# Altium PCB Sheet1.PCBDOC
Units mm, origin at the board's own origin, x right, y up, seen from the top; angles counter-clockwise.
Board outline 299.72 x 199.9 mm, 2 copper layers (Top Layer, Bottom Layer); 15 components, 19 nets, 83 pads, 8 vias.
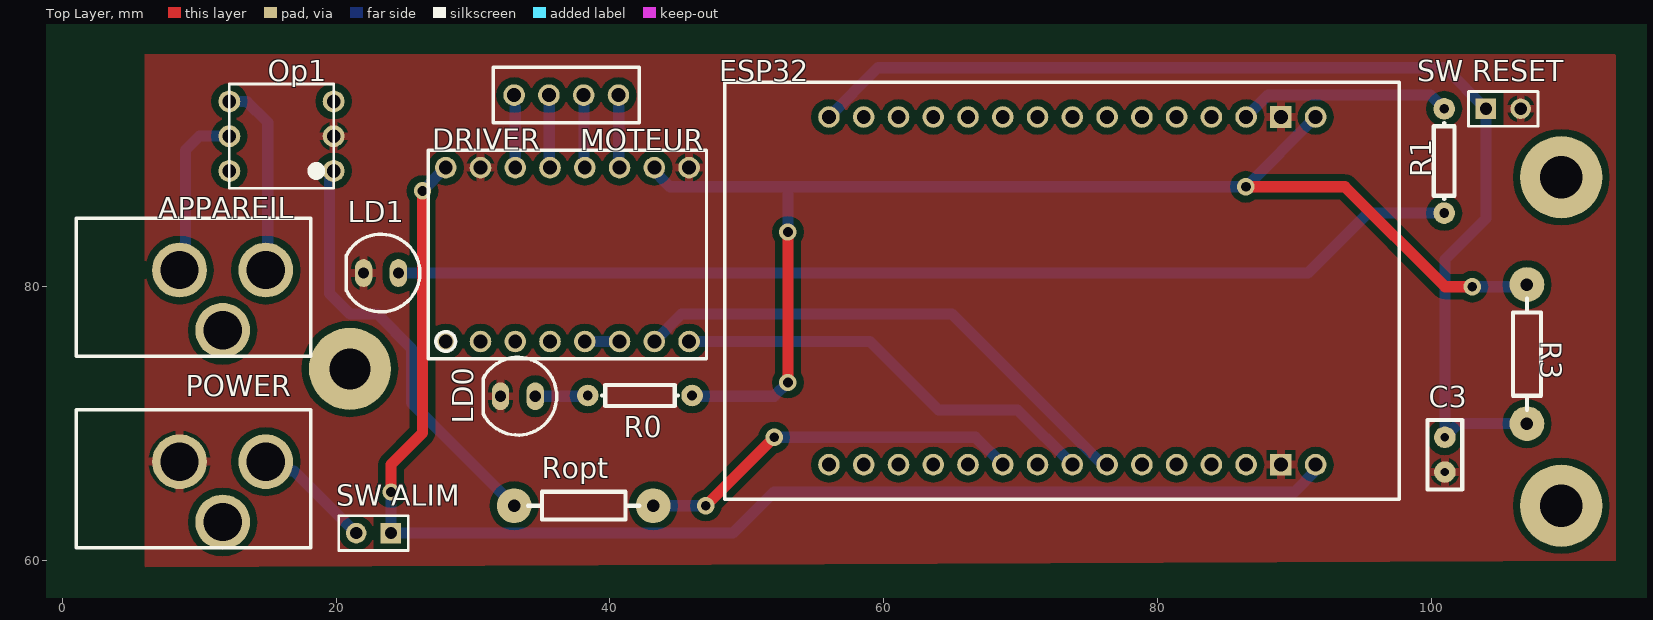
[diagram p0: Top Layer view]
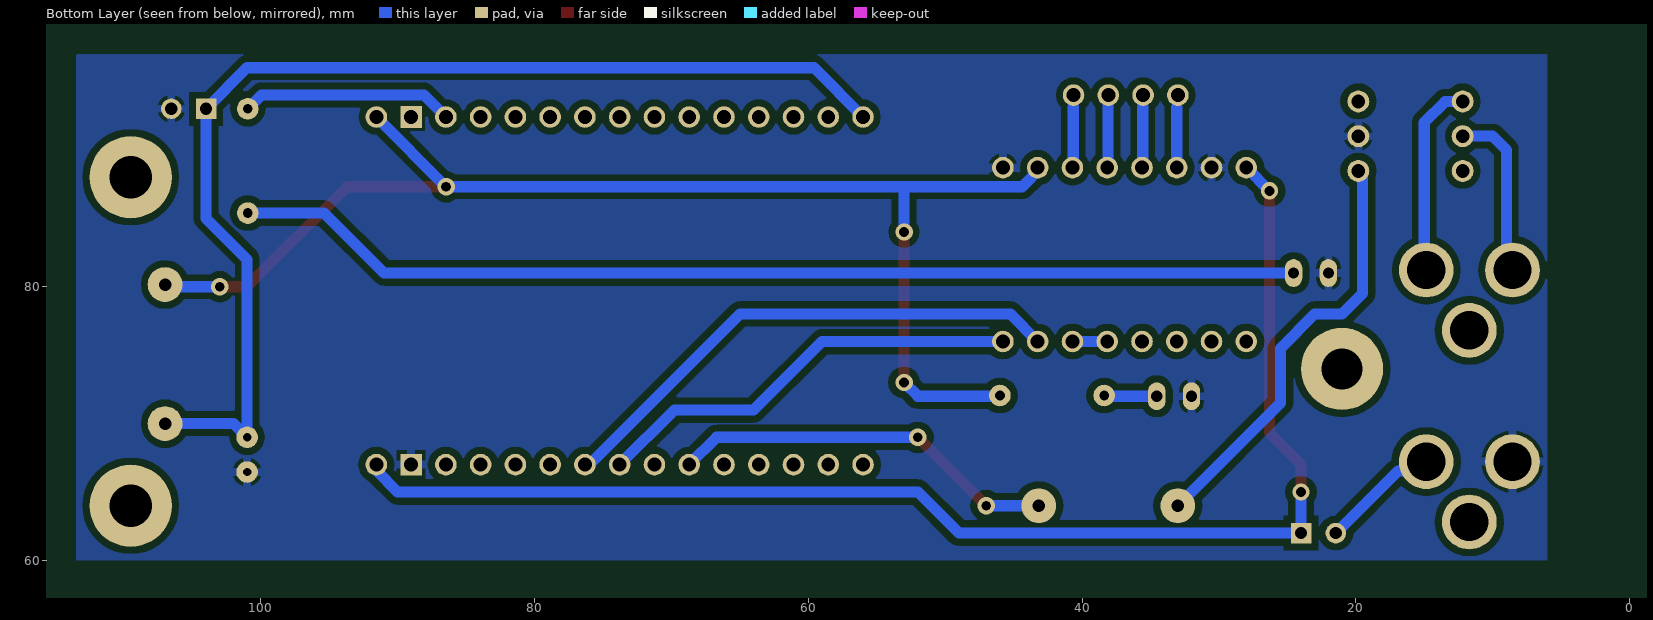
[diagram p1: Bottom Layer view, seen from below]

## Layer stack, top to bottom
Top Solder: solder mask 0.0102, Solder Resist, Dk 3.5
Top Layer: signal copper 0.0356
Dielectric1: dielectric 0.32, FR-4, Dk 4.8
Bottom Layer: signal copper 0.0356
Bottom Solder: solder mask 0.0102, Solder Resist, Dk 3.5

## Board outline
-141.655,-46.39 158.065,-46.39 158.065,153.508 -141.655,153.508

## Design rules (kind name [scope] priority, off if disabled: settings)
Clearance Clearance_bottom_polygon [OnLayer('Bottom Layer') Or OnLayer('Multi-Layer') vs OnLayer('Bottom Layer')  And  InPoly] p1: gap=0.508
Clearance Clearance_bottom_polygon_keepout [OnLayer('Bottom Layer') Or OnLayer('Multi-Layer') Or InPoly vs OnLayer('Keepout')] p2: gap=0
Clearance Clearance_top_polygon [OnLayer('Top Layer')  Or OnLayer('Multi-Layer') vs OnLayer('Top Layer') And InPoly] p3: gap=0.508
Clearance Clearance_bottom [OnLayer('Bottom Layer') Or OnLayer('Multi-Layer') vs OnLayer('Bottom Layer')  And Not InPoly] p4: gap=0.203
Clearance Clearance_top [OnLayer('Top Layer')  Or OnLayer('Multi-Layer') vs OnLayer('Top Layer') And Not InPoly] p5: gap=0.203
Clearance Clearance_pad_to_pad [OnLayer('Multi-Layer') vs OnLayer('Multi-Layer')] p6: gap=0.254
ComponentClearance ComponentClearance_bottom [OnLayer('Bottom Overlay') vs OnLayer('Bottom Overlay')] p1: gap=0 collisioncheckmode=3 verticalgap=0.254 showdistances=FALSE
ComponentClearance ComponentClearance_top [OnLayer('Top Overlay') vs OnLayer('Top Overlay')] p2: gap=0 collisioncheckmode=3 verticalgap=0.254 showdistances=FALSE
FabricationTestPointUsage TestPointUsage [All] p1: valid=0 allowmultiple=FALSE
FabricationTestpoint Testpoint [All] p1: side=3 testpointundercomponent=TRUE minsize=1.016 maxsize=2.54 preferedsize=1.524 minholesize=0 maxholesize=1.016 preferedholesize=0.813 testpointgrid=0.025 allowsidetop=TRUE allowsidebottom=TRUE usegrid=TRUE gridtolerance=0
HoleSize [All] p1: absolutevalues=TRUE maxlimit=25.4 minlimit=0.406 maxpercent=80.000 minpercent=20.000
MinimumAnnularRing [PadXSize_AllLayers = PadYSize_AllLayers] p1: minimumring=0.254
PermittedLayers [All] p1: toplayerpermitted=TRUE bottomlayerpermitted=TRUE
PolygonConnect [All] p1: connectstyle=Relief reliefconductorwidth=0.61 reliefentries=4 polygonreliefangle="90 Angle" airgapwidth=0.254
RoutingVias [All] p1: holewidth=0.406 width=1.27 viastyle="Through Hole" minholewidth=0.406 minwidth=1.27 maxholewidth=25.4 maxwidth=25.4
SMDToPlane [All] p1: distance=0
SolderMaskExpansion [All] p1: expansion=0.102
ViasUnderSMD [All] p1: allowed=FALSE
Width Width_botom_top [OnLayer('Bottom Layer') or OnLayer('Top Layer')] p1: maxlimit=254 minlimit=0.813 preferedwidth=0.813 minimp=50.000000 maximp=50.000000 favimp=50.000000
26 further rules are at their usual default settings.

## Components (designator, comment, footprint, x,y, rotation, side; value= is the part's Value field where it differs from the comment)
APPAREIL "Connecteur Power" "Connecteur Power" 18,85 r180 top
C3 "CAP" RAD0.1 101,69 r270 top
DRIVER "Driver" Driver 28,76 r90 top
ESP32 "ESP32devKit" ESP32 56,67 r90 top
LD0 "comment" LED5 32,72 r270 top
LD1 "comment" LED5 22,81 r270 top
MOTEUR "Moteur" Moteur 33,94 r90 top (schematic designator Moteur)
Op1 "Optocoupler" 4N26 16,91 r180 top
POWER "Connecteur Power" "Connecteur Power" 18,71 r180 top
R0 "RES" AXIAL0.3 46,72 r180 top
R1 "RES" AXIAL0.3 101,93 r270 top
R3 "RES" AXIAL0.4 107,70 r90 top (schematic designator R?)
Ropt "RES" AXIAL0.4 33,64 r0 top
"SW ALIM" "Header 2" HDR1X2 24,62 r180 top
"SW RESET" "Header 2" HDR1X2 104,93 r0 top

## Footprints (in the part's own frame and the unit in brackets; to place one, negate y for a bottom-side part, rotate by r counter-clockwise, add the part's x,y. Pads: shape width x height; smd on the part's side, far side on the other; paste and mask are expansions set on the pad)
4N26 [mm]
  round 1.6 hole 1: 1(-3.81,2.54) 2(-3.81,0) 3(-3.81,-2.54) 4(3.81,-2.54) 5(3.81,0) 6(3.81,2.54)
  silkscreen extent -3.81,-3.81 3.81,3.81
AXIAL0.3 [mil]
  round 62 hole 28: 1(0,-2) 2(300,-2)
  silkscreen extent 41,-32 259,28
AXIAL0.4 [mil]
  round 100 hole 36: 1(0,0) 2(400,0)
  silkscreen extent 40,-40 360,40
"Connecteur Power" [mm]
  round 4 hole 2.8: 0(3.15,3.78) 1(9.45,3.78) 2(6.3,8.19)
  silkscreen extent -0.13,0 17.01,10.08
Driver [mm]
  round 1.575 hole 1.016: 1(0,0) 2(0,-2.54) 3(0,-5.08) 4(0,-7.62) 5(0,-10.16) 6(0,-12.7) 7(0,-15.24) 8(0,-17.78) 9(12.7,-17.78) 10(12.7,-15.24) 11(12.7,-12.7) 12(12.7,-10.16) 13(12.7,-7.62) 14(12.7,-5.08) 15(12.7,-2.54) 16(12.7,0)
  silkscreen extent -1.27,-19.05 13.97,1.27
ESP32 [mm]
  round 1.575 hole 1.016: 0(0,0) 1(0,-2.54) 2(0,-5.08) 3(0,-7.62) 4(0,-10.16) 5(0,-12.7) 6(0,-15.24) 7(0,-17.78) 8(0,-20.32) 9(0,-22.86) 10(0,-25.4) 11(0,-27.94) 12(0,-30.48) 14(0,-35.56) 15(25.4,-35.56) 17(25.4,-30.48) 18(25.4,-27.94) 19(25.4,-25.4) 20(25.4,-22.86) 21(25.4,-20.32) 22(25.4,-17.78) 23(25.4,-15.24) 24(25.4,-12.7) 25(25.4,-10.16) 26(25.4,-7.62) 27(25.4,-5.08) 28(25.4,-2.54) 29(25.4,0)
  rect 1.575x1.575 hole 1.016: 13(0,-33.02) 16(25.4,-33.02)
  silkscreen extent -2.54,-41.66 27.94,7.62
HDR1X2 [mm] "Connector; Header; 2 Position"
  rect 1.5x1.5 hole 0.9: 1(0,0)
  round 1.5 hole 0.9: 2(2.54,0)
  silkscreen extent -1.27,-1.27 3.81,1.27
LED5 [mil] "5mm LED"
  oval 80x50 hole 32: A(0,100) K(0,0)
  silkscreen extent -112,-50 112,162
Moteur [mm]
  round 1.575 hole 1.016: 1(0,0) 2(0,-2.54) 3(0,-5.08) 4(0,-7.62)
  silkscreen extent -2.03,-9.14 2.03,1.52
RAD0.1 [mil]
  round 62 hole 24: 1(0,0) 2(100,0)
  silkscreen extent -50,-50 150,50

## Part data
C3: "capacité non polarisée"
DRIVER: "Driver A4988"
LD0 LD1: library part LED, "LED 5mm/3mm/CMS"
R0 R1 R3 Ropt: "resistance"
"SW ALIM" "SW RESET": "Header, 2-Pin"

## Free pads (board coordinates)
  round 6 hole 3: 0(21,74)
  round 6 hole 3.1: 1(109.5,88) 2(109.5,64)

## Via types
v1: diameter 1.27, hole 0.711, Top Layer to Bottom Layer, 8 vias

## Nets (pads, with @x,y where several pads share a name; then routed paths per layer and width w, separated by ;. In a path a pad name is that pad's centre, name@x,y a point inside that pad or via, vN(x,y) a via of type N, cw(c..) or ccw(c..) an arc to the next point about the centre after c; other vN are vias at no path point)
GND: "SW RESET.2" C3.2 DRIVER.9 DRIVER.15 ESP32.13 ESP32.16 LD0.K LD1.K Op1.2 POWER.1
NetAPPAREIL_0: APPAREIL.0 Op1.4 | length 14.7
  Bottom Layer w0.813: Op1.4 13.46,93.54 15,92 15,82.37 APPAREIL.0@13.85,81.22
NetAPPAREIL_1: APPAREIL.1 Op1.5 | length 13
  Bottom Layer w0.813: APPAREIL.1@7.55,81.22 9,82.67 9,90 10,91 Op1.5
NetC3_1: "SW RESET.1" C3.1 ESP32.29 R3.1 | length 82.4
  Bottom Layer w0.813: ESP32.29 59.6,96 101,96 104,93 104,85 101,82 C3.1 102,70 R3.1
NetDRIVER_5: DRIVER.5 DRIVER.6 | length 2.5
  Bottom Layer w0.813: DRIVER.5 DRIVER.6
NetDRIVER_7: DRIVER.7 ESP32.8 | length 38.5
  Bottom Layer w0.813: DRIVER.7 45.24,78 65,78 76,67 ESP32.8
NetDRIVER_8: DRIVER.8 ESP32.7 | length 31.7
  Bottom Layer w0.813: DRIVER.8 59,76 64,71 69.78,71 ESP32.7
NetDRIVER_10: DRIVER.10 ESP32.15 R0.1 R3.2 | length 96.6
  Top Layer w0.813: v1(53,73) v1(53,84) ; v1(86.463,87.303) 93.697,87.303 101,80 v1(103,80)
  Bottom Layer w0.813: DRIVER.10 42.986,88.7 44.383,87.303 53,87.303 ; R0.1@46,72 52,72 v1(53,73) ; v1@53,84.245 53,87.303 ; ESP32.15 v1(86.463,87.303) 53,87.303 ; v1(103,80) 106.84,80 R3.2
NetDRIVER_11: DRIVER.11 MOTEUR.4 | length 4.5
  Bottom Layer w0.813: 40.64,93.142 40.64,88.76 DRIVER.11
NetDRIVER_12: DRIVER.12 MOTEUR.3 | length 4.7
  Bottom Layer w0.813: MOTEUR.3@38.1,93.41 38.1,88.76 DRIVER.12
NetDRIVER_13: DRIVER.13 MOTEUR.2 | length 4.5
  Bottom Layer w0.813: 35.56,93.142 35.56,88.76 DRIVER.13
NetDRIVER_14: DRIVER.14 MOTEUR.1 | length 4.4
  Bottom Layer w0.813: DRIVER.14 33.08,93.082
NetDRIVER_16: "SW ALIM.1" DRIVER.16 ESP32.14 | length 98.2
  Top Layer w0.813: v1(24,65) 24,67 26.3,69.3 v1(26.3,87)
  Bottom Layer w0.813: v1(24,65) 24,62 49,62 52,65 90,65 91.56,66.56 ESP32.14 ; v1(26.3,87) DRIVER.16
NetESP32_5: ESP32.5 Ropt.2 | length 28.4
  Top Layer w0.813: v1(47,64) v1(52,69)
  Bottom Layer w0.813: Ropt.2 v1(47,64) ; v1(52,69) 66.7,69 ESP32.5
NetESP32_17: ESP32.17 R1.1 | length 15.6
  Bottom Layer w0.813: ESP32.17 88.08,94 99.949,94 R1.1@101,92.949
NetLD0_A: LD0.A R0.2 | length 3.8
  Bottom Layer w0.813: LD0.A R0.2@38.38,72
NetLD1_A: LD1.A R1.2 | length 78.2
  Bottom Layer w0.813: LD1.A 25.54,81 91,81 95.38,85.38 R1.2
NetOp1_1: Op1.1 Ropt.1 | length 31.4
  Bottom Layer w0.813: Op1.1 19.5,88.15 19.5,79.5 21,78 23,78 25.5,75.5 25.5,71.5 Ropt.1
NetPOWER_0: "SW ALIM.2" POWER.0 | length 8.2
  Bottom Layer w0.813: POWER.0@15.16,66.54 16.92,66.54 21.46,62
pads on no net: APPAREIL.2 DRIVER.1 DRIVER.2 DRIVER.3 DRIVER.4 ESP32.0 ESP32.1 ESP32.2 ESP32.3 ESP32.4 ESP32.6 ESP32.9 ESP32.10 ESP32.11 ESP32.12 ESP32.18 ESP32.19 ESP32.20 ESP32.21 ESP32.22 ESP32.23 ESP32.24 ESP32.25 ESP32.26 ESP32.27 ESP32.28 Op1.3 Op1.6 POWER.2

## Polygon pours and split planes (outlines as drawn)
GND on Bottom Layer "Top Layer-No Net" (solid, pour order 8): 6,97 113.5,97 113.5,60 6,60
GND on Top Layer "Top Layer-No Net" (solid, pour order 10): 6,59.5 6,97 113.5,97 113.5,59.961

## Keep-outs
Keep-Out Layer:
  rectangle: -140.695,-46.21 -135.695,153.79
  rectangle: -135.695,-46.21 154.305,-41.21
  rectangle: 149.305,-41.21 154.305,153.79
  rectangle: -135.695,148.79 149.305,153.79

## Silkscreen, mask and mechanical layers (free items; w line width, h text height)
Mechanical 1:
  lines w0.813: 6,60 6,97 113.5,97 113.5,60 6,60
Mechanical 32:
  text "Les bandes en violet delimitent la surface utilisable...." at -127.762,169.266 h5.08
  text "Mais vous n'etes pas obliges de tout utiliser!!" at -109.982,158.699 h5.08
  text "ATTENTION:" at 165.633,139.979 h5.08
  text "Par defaut, les pistes" at 165.633,129.565 h5.08
  text "ont 32mil de largeur" at 165.506,119.964 h5.08
  text "En cas de besoin, cette largeur" at 165.786,110.769 h5.08
  text "peut etre reduite jusqu'a 10 mil" at 165.506,100.406 h5.08
  text "Par defaut, les vias" at 166.218,82.652 h5.08
  text "ont un diam. de 50 mil" at 166.065,72.492 h5.08
  text "En cas de besoin, ce diam." at 165.202,60.401 h5.08
  text "peut etre reduit jusqu'a 36 mil" at 165.811,49.479 h5.08